# Altium PCB Buck_Converter_7.5V.PcbDoc
Units mil, origin at the board's own origin, x right, y up, seen from the top; angles counter-clockwise.
Board outline 1535.43 x 1259.84 mil, 2 copper layers (Top Layer, Bottom Layer), stack 61.855 mil thick; 12 components, 9 nets, 31 pads, 382 vias.
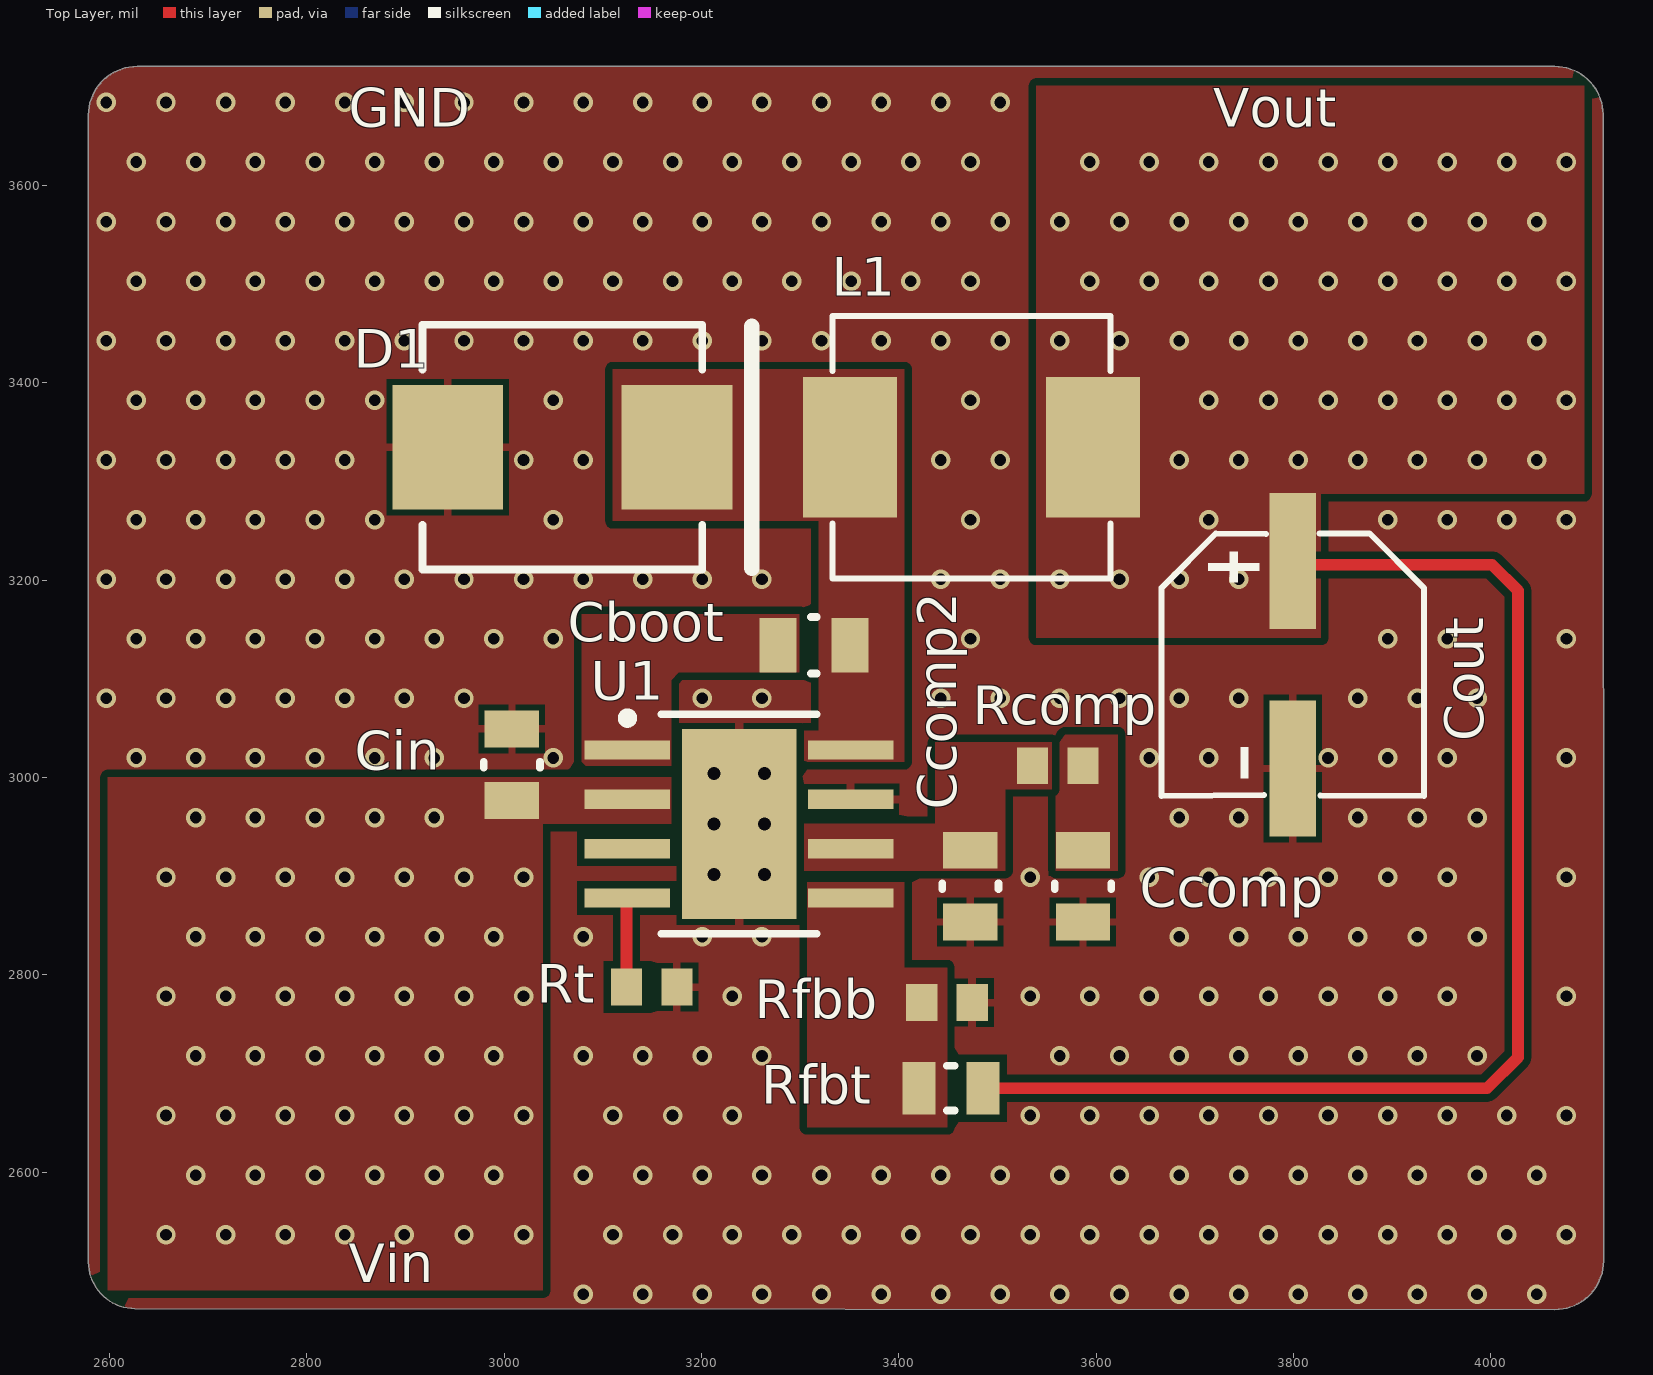
[diagram p0: Top Layer view]
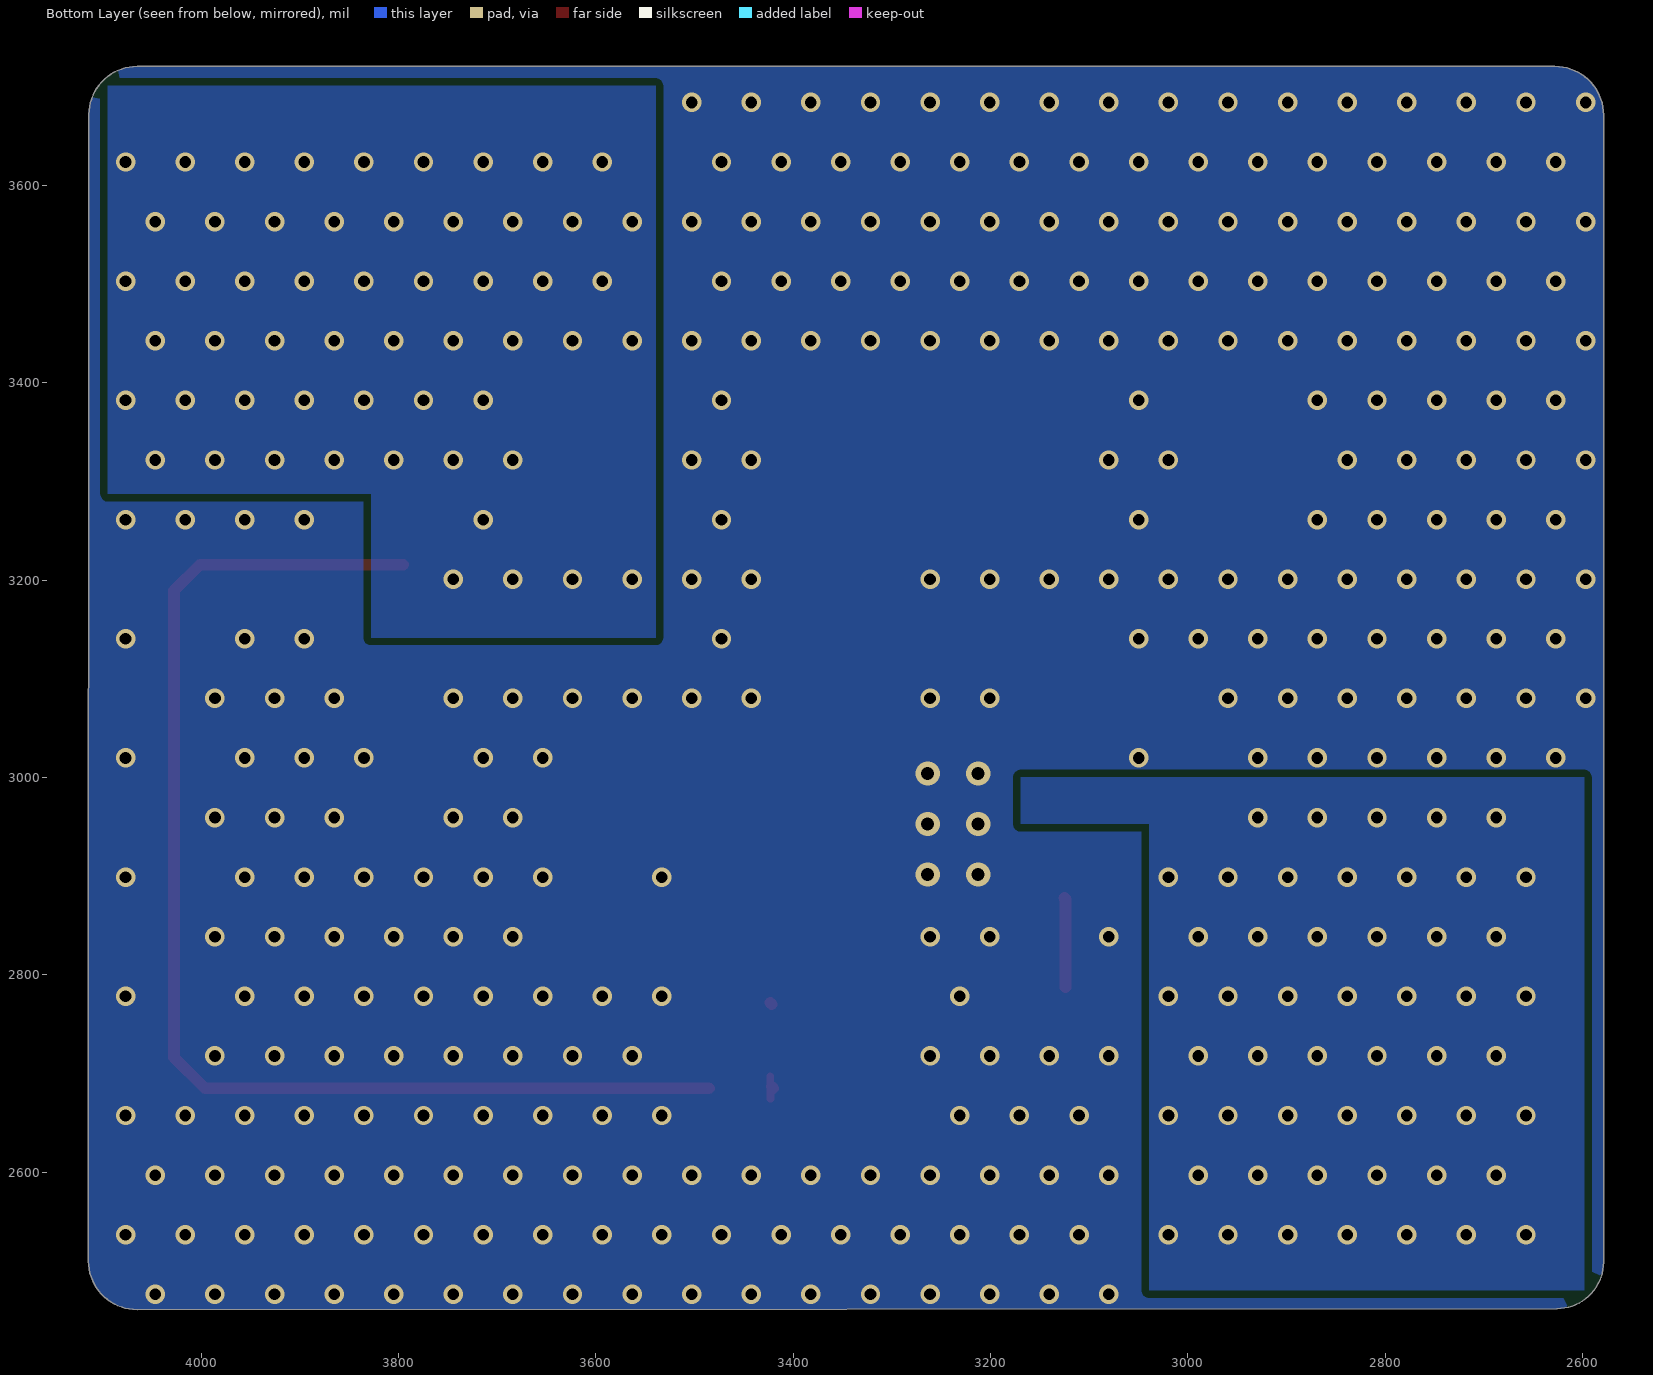
[diagram p1: Bottom Layer view, seen from below]
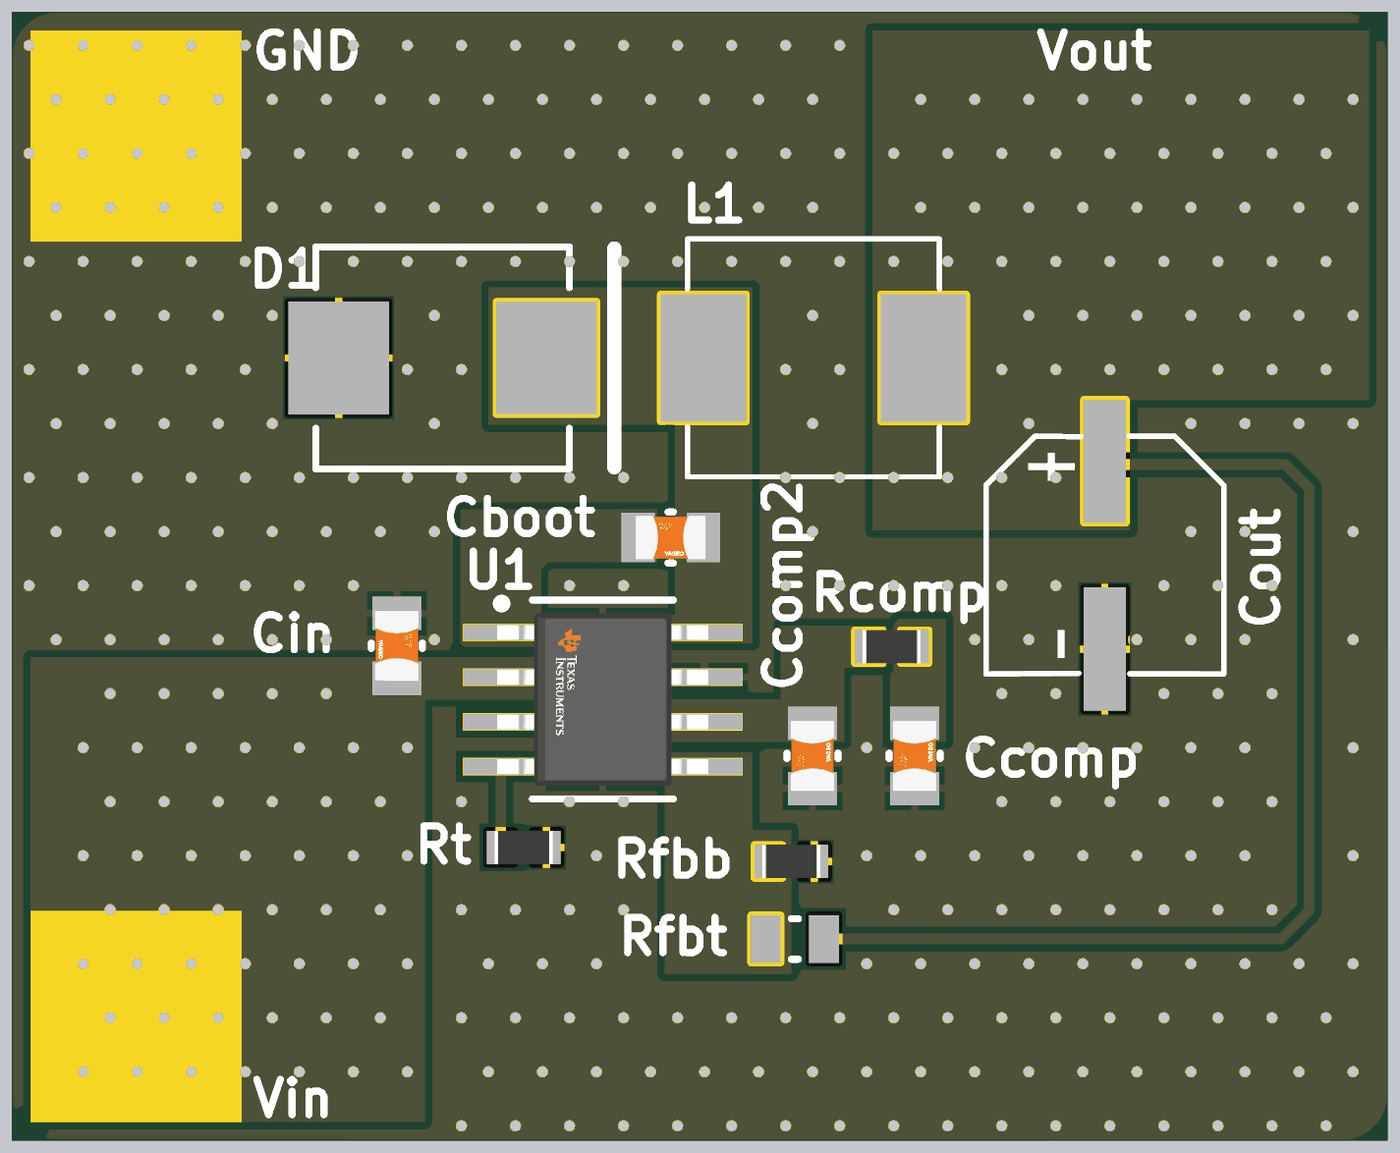
[diagram p2: 3D render of the assembled board from above, using the file's embedded part models]

## Layer stack, top to bottom
Top Solder: solder mask 0.4, Solder Resist, Dk 3.5
Top Layer: signal copper 1.4
Dielectric 1: dielectric 59.0551, FR-4, Dk 4.8
Bottom Layer: signal copper 1.4
Bottom Solder: solder mask 0.4, Solder Resist, Dk 3.5

## Board outline
2578.74,2508.81 ccw(c2625.92,2508.81) 2625.92,2461.63 4064.96,2460.63 ccw(c4064.96,2509.84) 4114.17,2509.84 4113.66,3671.26 4113.66,3671.77 ccw(c4064.96,3671.77) 4064.96,3720.47 2627.95,3720.47 ccw(c2627.95,3671.26) 2578.74,3671.26

## Design rules (kind name [scope] priority, off if disabled: settings)
Clearance [All] p1: gap=7.87 ignorepadtopadclearanceinfootprint=FALSE
DiffPairsRouting [All] p1: maxlimit=39.37 minlimit=5 mostfreqgap=7.87 toplayer_minwidth=5 toplayer_maxwidth=7.87 toplayer_prefwidth=7.87 bottomlayer_minwidth=5 bottomlayer_maxwidth=7.87 bottomlayer_prefwidth=7.87 maxuncoupledlength=500
Height [All] p1: minheight=0 maxheight=19685.04 prefheight=500
HoleSize [All] p1: absolutevalues=TRUE maxlimit=248.03 minlimit=11.81 maxpercent=80.000 minpercent=20.000
MinimumSolderMaskSliver [All] p1: minsoldermaskwidth=1.57
PolygonConnect CertainComponents [InComponent('C0','C00') vs InNet('GND')] p1: connectstyle=Direct reliefconductorwidth=7.87 reliefentries=4 polygonreliefangle="90 Angle" airgapwidth=7.87 // force certain component to be conencted with relieft connection
PolygonConnect GND [InNet('GND')] p2: thpad.connectstyle=Relief thpad.reliefconductorwidth=7.87 thpad.reliefentries=4 thpad.polygonreliefangle="90 Angle" thpad.airgapwidth=5.91 smdpad.connectstyle=Relief smdpad.reliefconductorwidth=7.87 smdpad.reliefentries=4 smdpad.polygonreliefangle="90 Angle" smdpad.airgapwidth=5.91 via.connectstyle=Direct via.reliefconductorwidth=10 via.reliefentries=4 via.polygonreliefangle="90 Angle" via.airgapwidth=10
PolygonConnect [All] p3: connectstyle=Direct reliefconductorwidth=11.81 reliefentries=4 polygonreliefangle="90 Angle" airgapwidth=7.87
RoutingVias [All] p1: holewidth=11.81 width=19.68 viastyle="Through Hole" minholewidth=11.81 minwidth=19.68 maxholewidth=248.03 maxwidth=275.59
SilkToSilkClearance [All] p1: silktosilkclearance=1.57
SilkToSolderMaskClearance [IsPad] p1: minsilkscreentomaskgap=1.57 clearancetoexposedcopper=TRUE
SolderMaskExpansion [All] p1: expansion=4 istentingtop=FALSE
SupplyNets "Schematic Supply Nets_2" [InNet('Vin')] p1: voltage=0.000
SupplyNets "Schematic Supply Nets_1" [InNet('Vout')] p2: voltage=0.000
SupplyNets "Schematic Supply Nets" [InNet('GND')] p3: voltage=0.000
Width [All] p1: maxlimit=78.74 minlimit=7.87 preferedwidth=7.87 minimp=50.000000 maximp=50.000000 favimp=50.000000
24 further rules are at their usual default settings.

## Components (designator, comment, footprint, x,y, rotation, side; value= is the part's Value field where it differs from the comment)
Cboot "100nF" FP-CC0805-0_85-MFG 3313.98,3133.86 r0 top value="100 nF"
Ccomp "560nF" FP-CC0805-0_85-MFG 3586.61,2889.76 r90 top value="100 nF"
Ccomp2 "16pF" FP-CC0805-0_85-MFG 3472.44,2889.76 r90 top value="100 nF"
Cin "4.7uF" FP-CC0805-0_85-MFG 3007.87,3012.8 r270 top value="100 nF"
Cout "100uF" CAP-SMD_BD6.3-L6.6-W6.6-LS7.6-RD 3799.21,3114.17 r270 top
D1 "B560C-13-F" DIOD-B5X0C-2_M 3059.06,3334.65 r180 top
L1 "8.2uH" IND-SMD_L7.0-W6.6_FXL0630 3473.54,3334.65 r180 top
Rcomp "28.7kR" RESC1609X50X30NL8T20 3561.02,3011.81 r180 top
Rfbb "11kR" RESC1609X50X30NL8T20 3448.82,2771.65 r180 top
Rfbt "92kR" RESC2013X50X30LL20T20 3452.76,2685.04 r0 top
Rt "105kR" RESC1609X50X30NL8T20 3149.61,2787.4 r180 top
U1 "TPS54560DDA" FP-DDA0008E-MFG 3238.19,2952.76 r0 top

## Footprints (in the part's own frame and the unit in brackets; to place one, negate y for a bottom-side part, rotate by r counter-clockwise, add the part's x,y. Pads: shape width x height; smd on the part's side, far side on the other; paste and mask are expansions set on the pad)
CAP-SMD_BD6.3-L6.6-W6.6-LS7.6-RD [mm]
  rect 3.5x1.2 smd: 1(-2.67,0) 2(2.67,0)
  silkscreen extent -3.38,-3.38 3.38,3.38
DIOD-B5X0C-2_M [mm] "Molded Diode, 2-Leads, Body 7.11x6.22mm, IPC Low Density"
  rect 2.85x3.2 smd: 1(-2.95,0) 2(2.95,0)
  silkscreen extent -4.87,-3.15 3.6,3.15, body extent -3.56,-3.11 3.55,3.11, height 2.63
FP-CC0805-0_85-MFG [mm]
  rect 0.95x1.4 smd paste+0 mask+0: 1(-0.925,0) 2(0.925,0)
  silkscreen extent -0.08,-0.72 0.08,0.72, body extent -1.6,-1.05 1.6,1.05, height 0.25
FP-DDA0008E-MFG [mm]
  rect 2.2x0.5 smd paste-1000 mask+0: 1(-2.875,1.905) 2(-2.875,0.635) 3(-2.875,-0.635) 4(-2.875,-1.905) 5(2.875,-1.905) 6(2.875,-0.635) 7(2.875,0.635) 8(2.875,1.905)
  rect 2.95x4.9 smd paste-1000 mask-1000: 9(0,0)
  silkscreen extent -3,-2.83 2,2.85, body extent -4.08,-2.68 4.08,2.68, height 0.25
IND-SMD_L7.0-W6.6_FXL0630 [mm]
  rect 2.424x3.62 smd: 1(3.128,0) 2(-3.128,0)
  silkscreen extent -3.58,-3.38 3.58,3.38
RESC1609X50X30NL8T20 [mm] "Chip Resistor, 2-Leads, Body 1.65x0.95mm, IPC Medium Density"
  rect 0.8x0.95 smd: 1(-0.65,0) 2(0.65,0)
  body extent -0.82,-0.48 0.82,0.48, height 0.5
RESC2013X50X30LL20T20 [mm] "Chip Resistor, 2-Leads, Body 2.00x1.25mm, IPC High Density"
  rect 0.85x1.35 smd: 1(-0.825,0) 2(0.825,0)
  silkscreen extent -0.1,-0.58 0.1,0.58, body extent -1.1,-0.72 1.1,0.72, height 0.5

## Part data
Cboot Ccomp Ccomp2 Cin: library part CMP-2100-03606-3, "CAP CER 0.1UF 50V X7R 0805", Capacitance="100 nF", Manufacturer=Yageo, Manufacturer Part Number=CC0805KRX7R9BB104, Package=CC0805-0.85, Temperature="-30°C to +85°C", Temperature Characteristic=X7R, Temperature Range High=+85°C, Temperature Range Low=-30°C, Tolerance=0.1, Voltage Rating="50 V", Automotive=No, Category=Cap, ComponentLink2Description=Datasheet, ComponentLink2URL=http://www.yageo.com/documents/recent/UPY-GPHC_Y5V_6.3V-to-50V_8.pdf, Device Class L1="Passive Components", Device Class L2=Capacitors, Device Class L3="Ceramic Capacitors", Digikey Description="CAP CER 0.1UF 50V X7R 0805", Footprint Url=http://www.yageo.com/exep/pages/download/literatures/UPY-C_GEN_24.pdf, Height=0.95mm, Ipc Land Pattern Name=CAPC200125X85, Lead Free=Yes, Material=Ceramic, Mouser Description="Multilayer Ceramic Capacitors MLCC - SMD/SMT 100nF 50V X7R 10%", Octopart=https://octopart.com/cc0805krx7r9bb104-yageo-192993, RoHS=TRUE
Cout: library part RVT1H101M0607, JLCPCB Part Class=扩展库, LCSC Part Name="100uF ±20% 50V", Manufacturer=ROQANG(容强), Operating Temperature=-40℃~+105℃, Ripple Current=229mA@120Hz, Tolerance=±20%, Voltage Rating=50V, Add into BOM=yes, Convert to PCB=yes, Datasheet=https://atta.szlcsc.com/upload/public/pdf/source/20170325/1490427950282.pdf, Device=RVT1H101M0607, Diameter=6.3mm, Height - Seated (Max)=7.7mm, Lifetime=2000hrs@105℃, Manufacturer Part=RVT1H101M0607, Supplier=LCSC, Supplier Footprint=SMD,D6.3xL7.7mm, Supplier Part=C3151829, Symbol=RVT1H101M0607
D1: library part CMP-2000-05098-2, "Schottky Barrier Rectifier, 5 A, 60 V, -55 to 125 degC, 2-Pin SMD, RoHS, Tape and Reel", If - Forward Current=5A, Ifsm - Forward Surge Current=100A, Ir - Reverse Current=500uA, Manufacturer=DiodesIncorporated, Maximum Operating Temperature=+125C, Minimum Operating Temperature=-55C, Operating Temperature Range=-55Cto+125C, Package / Case=SMC, Vf - Forward Voltage=0.7V, Vrrm - Repetitive Reverse Voltage=60V, Brand=DiodesIncorporated, Configuration=Single, Datasheet URL=https://datasheet.ciiva.com/27052/1538961-27052355.pdf, Datasheet Version="Rev. 7-2, 06/2007", Factory Pack Quantity=3000, Height=2.5mm, Length=7.11mm, Manufacturer URL=http://www.diodes.com/, Mounting Style=SMD/SMT, Packaging=Reel, Product=SchottkyDiodes, Product Category=SchottkyDiodes&Rectifiers, RoHS=True, Series=B560, Technology=Si, Termination Style=SMD/SMT, Type=SchottkyBarrierRectifier, Unit Weight=0.007408oz, Width=6.22mm
L1: library part FXL0630-8R2-M, DC Resistance (DCR)=60mΩ, JLCPCB Part Class=扩展库, LCSC Part Name="8.2uH ±20% 6A", Manufacturer=cjiang(长江微电), Rated Current=5A, Saturation Current (Isat)=6A, Tolerance=±20%, Add into BOM=yes, Convert to PCB=yes, Datasheet=https://atta.szlcsc.com/upload/public/pdf/source/20240426/3189EA8206330E2108542F9E34E540E7.pdf, Device=FXL0630-8R2-M, Manufacturer Part=FXL0630-8R2-M, Supplier=LCSC, Supplier Footprint=SMD,6.6x7mm, Supplier Part=C167222, Symbol=FXL0630-8R2-M, Type=一体成型电感
Rcomp Rfbb Rt: library part CMP-1666-00005-4, "Chip Resistor, 10 KOhm, +/- 1%, 100 mW, -55 to 155 degC, 0603 (1608 Metric), RoHS, Tape and Reel", Manufacturer="Vishay Semiconductor", Max Operating Temperature="155 degC", Min Operating Temperature="-55 degC", Package Quantity=5000, Voltage Rating="75 V", ComponentLink1Description="Manufacturer URL", ComponentLink1URL=http://www.vishay.com/, ComponentLink2Description=Datasheet, ComponentLink2URL=https://datasheet.ciiva.com/11809/0900766b80d98afc-11809037.pdf, DatasheetVersion=06/2012, Height="0.45 mm", Length="1.55 mm", Mounting Technology="Surface Mount", PackageDescription="2-Pin Surface Mount Device, Body 1.575 x 0.85 mm", PackageReference=0603, Packaging="Tape and Reel", REACH SVHC=Unknown, RoHSCompliant=true
Rfbt: library part CMP-2001-04896-1, Manufacturer="Vishay Dale", Part Number=CRCW08050000Z0EA
U1: library part CMP-04918-000033-1, "IC REG BCK SPLIT RAIL ADJ 8SOPWR", Manufacturer="Texas Instruments", Max Junction Temp=+150°C, Max Supply Voltage=60V, Min Supply Voltage=4.5V, Nominal Supply Current=146uA, Output Current=5A, Output Voltage=0.8-58.8V, Package=DDA0008E, Switching Frequency=100-2500kHz, Temperature="-40°C to +125°C", Temperature Range High=+125°C, Temperature Range Low=-40°C, Automotive=No, Category=IC, ComponentLink2Description=Datasheet, ComponentLink2URL=http://www.ti.com/lit/ds/symlink/tps54560.pdf, Device Class L1="Integrated Circuits (ICs)", Device Class L2="Power Management ICs", Device Class L3="Voltage Regulators - Switching", Digikey Description="IC REG BCK SPLIT RAIL ADJ 8SOPWR", Height=1.7mm, Ipc Land Pattern Name=SOIC127P600X170-8, Lead Free=Yes, Manufacturer Part Number=TPS54560DDA, Max Duty Cycle=100%, Mouser Description="Voltage Regulators - Switching Regulators 60V Input 5 A SD DC-DC Cnvtr", Number Of Outputs=1, Octopart=https://octopart.com/tps54560dda-texas+instruments-26977150, Output Type=AdjustableProgrammable, RoHS=TRUE, Standoff Height=0mm, Switching Topology=Buck

## Via types
v1: diameter 19.68, hole 11.81, Top Layer to Bottom Layer, tented both sides, 376 vias
v2: diameter 24.8, hole 12.99, Top Layer to Bottom Layer, 6 vias

## Nets (pads, with @x,y where several pads share a name; then routed paths per layer and width w, separated by ;. In a path a pad name is that pad's centre, name@x,y a point inside that pad or via, vN(x,y) a via of type N, cw(c..) or ccw(c..) an arc to the next point about the centre after c; other vN are vias at no path point)
GND: Ccomp2.1 Ccomp.1 Cin.1 Cout.2 D1.2 Rfbb.1 Rt.1 U1.7 U1.9
  other v1: 3080.08,2476.14 3140.47,2476.14 3200.87,2476.14 3261.26,2476.14 3321.65,2476.14 3382.05,2476.14 3442.44,2476.14 3502.83,2476.14 3563.23,2476.14 3623.62,2476.14 3684.02,2476.14 3744.41,2476.14 3804.8,2476.14 3865.2,2476.14 3925.59,2476.14 3985.98,2476.14 4046.38,2476.14 3110.28,2536.54 3170.67,2536.54 3231.06,2536.54 3291.46,2536.54 3351.85,2536.54 3412.24,2536.54 3472.64,2536.54 3533.03,2536.54 3593.43,2536.54 3653.82,2536.54 3714.21,2536.54 3774.61,2536.54 3835,2536.54 3895.39,2536.54 3955.79,2536.54 4016.18,2536.54 4076.57,2536.54 3080.08,2596.93 3140.47,2596.93 3200.87,2596.93 3261.26,2596.93 3321.65,2596.93 3382.05,2596.93 3442.44,2596.93 3502.83,2596.93 3563.23,2596.93 3623.62,2596.93 3684.02,2596.93 3744.41,2596.93 3804.8,2596.93 3865.2,2596.93 3925.59,2596.93 3985.98,2596.93 4046.38,2596.93 3110.28,2657.32 3170.67,2657.32 3231.06,2657.32 3533.03,2657.32 3593.43,2657.32 3653.82,2657.32 3714.21,2657.32 3774.61,2657.32 3835,2657.32 3895.39,2657.32 3955.79,2657.32 4016.18,2657.32 4076.57,2657.32 3080.08,2717.72 3140.47,2717.72 3200.87,2717.72 3261.26,2717.72 3563.23,2717.72 3623.62,2717.72 3684.02,2717.72 3744.41,2717.72 3804.8,2717.72 3865.2,2717.72 3925.59,2717.72 3985.98,2717.72 3231.06,2778.11 3533.03,2778.11 3593.43,2778.11 3653.82,2778.11 3714.21,2778.11 3774.61,2778.11 3835,2778.11 3895.39,2778.11 3955.79,2778.11 4076.57,2778.11 3080.08,2838.5 3200.87,2838.5 3261.26,2838.5 3684.02,2838.5 3744.41,2838.5 3804.8,2838.5 3865.2,2838.5 3925.59,2838.5 3985.98,2838.5 3533.03,2898.9 3653.82,2898.9 3714.21,2898.9 3774.61,2898.9 3835,2898.9 3895.39,2898.9 3955.79,2898.9 4076.57,2898.9 3684.02,2959.29 3744.41,2959.29 3865.2,2959.29 3925.59,2959.29 3985.98,2959.29 2627.13,3019.68 2687.52,3019.68 2747.91,3019.68 2808.31,3019.68 2868.7,3019.68 2929.09,3019.68 3049.88,3019.68 3653.82,3019.68 3714.21,3019.68 3835,3019.68 3895.39,3019.68 3955.79,3019.68 4076.57,3019.68 2596.93,3080.08 2657.32,3080.08 2717.72,3080.08 2778.11,3080.08 2838.5,3080.08 2898.9,3080.08 2959.29,3080.08 3200.87,3080.08 3261.26,3080.08 3442.44,3080.08 3502.83,3080.08 3563.23,3080.08 3623.62,3080.08 3684.02,3080.08 3744.41,3080.08 3865.2,3080.08 3925.59,3080.08 3985.98,3080.08 2627.13,3140.47 2687.52,3140.47 2747.91,3140.47 2808.31,3140.47 2868.7,3140.47 2929.09,3140.47 2989.49,3140.47 3049.88,3140.47 3472.64,3140.47 3895.39,3140.47 3955.79,3140.47 4076.57,3140.47 2596.93,3200.87 2657.32,3200.87 2717.72,3200.87 2778.11,3200.87 2838.5,3200.87 2898.9,3200.87 2959.29,3200.87 3019.68,3200.87 3080.08,3200.87 3140.47,3200.87 3200.87,3200.87 3261.26,3200.87 3442.44,3200.87 3502.83,3200.87 2627.13,3261.26 2687.52,3261.26 2747.91,3261.26 2808.31,3261.26 2868.7,3261.26 3049.88,3261.26 3472.64,3261.26 3895.39,3261.26 3955.79,3261.26 4016.18,3261.26 4076.57,3261.26 2596.93,3321.65 2657.32,3321.65 2717.72,3321.65 2778.11,3321.65 2838.5,3321.65 3019.68,3321.65 3080.08,3321.65 3442.44,3321.65 3502.83,3321.65 2627.13,3382.05 2687.52,3382.05 2747.91,3382.05 2808.31,3382.05 2868.7,3382.05 3049.88,3382.05 3472.64,3382.05 2596.93,3442.44 2657.32,3442.44 2717.72,3442.44 2778.11,3442.44 2838.5,3442.44 2898.9,3442.44 2959.29,3442.44 3019.68,3442.44 3080.08,3442.44 3140.47,3442.44 3200.87,3442.44 3261.26,3442.44 3321.65,3442.44 3382.05,3442.44 3442.44,3442.44 3502.83,3442.44 2627.13,3502.83 2687.52,3502.83 2747.91,3502.83 2808.31,3502.83 2868.7,3502.83 2929.09,3502.83 2989.49,3502.83 3049.88,3502.83 3110.28,3502.83 3170.67,3502.83 3231.06,3502.83 3291.46,3502.83 3351.85,3502.83 3412.24,3502.83 3472.64,3502.83 2596.93,3563.23 2657.32,3563.23 2717.72,3563.23 2778.11,3563.23 2838.5,3563.23 2898.9,3563.23 2959.29,3563.23 3019.68,3563.23 3080.08,3563.23 3140.47,3563.23 3200.87,3563.23 3261.26,3563.23 3321.65,3563.23 3382.05,3563.23 3442.44,3563.23 3502.83,3563.23 2627.13,3623.62 2687.52,3623.62 2747.91,3623.62 2808.31,3623.62 2868.7,3623.62 2929.09,3623.62 2989.49,3623.62 3049.88,3623.62 3110.28,3623.62 3170.67,3623.62 3231.06,3623.62 3291.46,3623.62 3351.85,3623.62 3412.24,3623.62 3472.64,3623.62 2596.93,3684.02 2657.32,3684.02 2717.72,3684.02 2778.11,3684.02 2838.5,3684.02 2898.9,3684.02 2959.29,3684.02 3019.68,3684.02 3080.08,3684.02 3140.47,3684.02 3200.87,3684.02 3261.26,3684.02 3321.65,3684.02 3382.05,3684.02 3442.44,3684.02 3502.83,3684.02
  other v2: 3212.6,2901.57 3263.78,2901.57 3212.6,2952.76 3263.78,2952.76 3212.6,3003.94 3263.78,3003.94
NetCboot_1: Cboot.1 U1.1
NetCboot_2: Cboot.2 D1.1 L1.1 U1.8
NetCcomp2_2: Ccomp2.2 Rcomp.2 U1.6
NetCcomp_2: Ccomp.2 Rcomp.1
NetRfbb_2: Rfbb.2 Rfbt.1 U1.5 | length 26.8
  Top Layer w7.87: Rfbt.1@3422.97,2674.21 3423.09,2685.01 Rfbt.1@3423.23,2696.85
  Top Layer w11.81: Rfbt.1 Rfbt.1@3421.75,2686.52 ; Rfbb.2@3421.75,2770.18 Rfbb.2
NetRt_2: Rt.2 U1.4 | length 90.8
  Top Layer w11.81: Rt.2 3124.02,2876.77 U1.4
Vin: Cin.2 U1.2
  other v1: 2657.32,2536.54 2717.72,2536.54 2778.11,2536.54 2838.5,2536.54 2898.9,2536.54 2959.29,2536.54 3019.68,2536.54 2687.52,2596.93 2747.91,2596.93 2808.31,2596.93 2868.7,2596.93 2929.09,2596.93 2989.49,2596.93 2657.32,2657.32 2717.72,2657.32 2778.11,2657.32 2838.5,2657.32 2898.9,2657.32 2959.29,2657.32 3019.68,2657.32 2687.52,2717.72 2747.91,2717.72 2808.31,2717.72 2868.7,2717.72 2929.09,2717.72 2989.49,2717.72 2657.32,2778.11 2717.72,2778.11 2778.11,2778.11 2838.5,2778.11 2898.9,2778.11 2959.29,2778.11 3019.68,2778.11 2687.52,2838.5 2747.91,2838.5 2808.31,2838.5 2868.7,2838.5 2929.09,2838.5 2989.49,2838.5 2657.32,2898.9 2717.72,2898.9 2778.11,2898.9 2838.5,2898.9 2898.9,2898.9 2959.29,2898.9 3019.68,2898.9 2687.52,2959.29 2747.91,2959.29 2808.31,2959.29 2868.7,2959.29 2929.09,2959.29
Vout: Cout.1 L1.2 Rfbt.2 | length 1271
  Top Layer w11.81: Rfbt.2 3996.06,2685.04 4027.56,2716.54 4027.56,3188.98 4001.18,3215.35 Cout.1@3795.28,3215.35
  other v1: 3563.23,3200.87 3623.62,3200.87 3684.02,3200.87 3744.41,3200.87 3714.21,3261.26 3684.02,3321.65 3744.41,3321.65 3804.8,3321.65 3865.2,3321.65 3925.59,3321.65 3985.98,3321.65 4046.38,3321.65 3714.21,3382.05 3774.61,3382.05 3835,3382.05 3895.39,3382.05 3955.79,3382.05 4016.18,3382.05 4076.57,3382.05 3563.23,3442.44 3623.62,3442.44 3684.02,3442.44 3744.41,3442.44 3804.8,3442.44 3865.2,3442.44 3925.59,3442.44 3985.98,3442.44 4046.38,3442.44 3593.43,3502.83 3653.82,3502.83 3714.21,3502.83 3774.61,3502.83 3835,3502.83 3895.39,3502.83 3955.79,3502.83 4016.18,3502.83 4076.57,3502.83 3563.23,3563.23 3623.62,3563.23 3684.02,3563.23 3744.41,3563.23 3804.8,3563.23 3865.2,3563.23 3925.59,3563.23 3985.98,3563.23 4046.38,3563.23 3593.43,3623.62 3653.82,3623.62 3714.21,3623.62 3774.61,3623.62 3835,3623.62 3895.39,3623.62 3955.79,3623.62 4016.18,3623.62 4076.57,3623.62
pads on no net: U1.3

## Polygon pours and split planes (outlines as drawn)
Vout on Top Layer "VOUT_L01_P022" (solid, remove dead copper, pour order 22): 4094.49,3700.79 4094.49,3287.4 3827.76,3287.4 3827.76,3141.73 3767.72,3141.73 3539.37,3141.73 3539.37,3255.91 3539.37,3700.79
GND on Top Layer "NONET_L-01_P-001" (solid, remove dead copper, pour order 34): 2578.74,2508.81 ccw(c2625.92,2508.81) 2625.92,2461.63 4064.96,2460.63 ccw(c4064.96,2509.84) 4114.17,2509.84 4113.66,3671.26 4113.66,3671.77 ccw(c4064.96,3671.77) 4064.96,3720.47 2627.95,3720.47 ccw(c2627.95,3671.26) 2578.74,3671.26
NetCboot_2 on Top Layer "NETCBOOT_2_L01_P016" (solid, remove dead copper, pour order 16): 3405.51,3413.39 3110.24,3413.39 3110.24,3259.84 3318.9,3259.84 3318.9,3047.24 3303.15,3047.24 3303.15,3011.81 3307.09,3015.75 3405.51,3015.75
Vin on Top Layer "VIN_L01_P014" (solid, remove dead copper, pour order 14): 2992.13,3000 3169.29,3000 3169.29,2952.76 3039.37,2952.76 3039.37,2480.32 2598.43,2480.32 2598.43,3000
NetCboot_1 on Top Layer "NONET_L-01_P-001" (solid, remove dead copper, pour order 32): 3299.21,3165.35 3078.74,3165.35 3078.74,3015.75 3082.68,3011.81 3169.29,3011.81 3169.29,3098.43 3177.17,3106.3 3299.21,3106.3
NetCcomp_2 on Top Layer "NETCCOMP_2_L01_P019" (solid, remove dead copper, pour order 19): 3559.06,3043.31 3622.05,3043.31 3622.05,2905.51 3559.06,2905.51
NetCcomp2_2 on Top Layer "NETCCOMP2_2_L01_P018" (solid, remove dead copper, pour order 18): 3555.12,3035.43 3555.12,2988.19 3507.87,2988.19 3507.87,2905.51 3303.15,2905.51 3303.15,2952.76 3437.01,2952.76 3437.01,3035.43
NetRfbb_2 on Top Layer "NETRFBB_2_L01_P015" (solid, remove dead copper, pour order 15): 3307.09,2893.7 3307.09,2645.67 3448.82,2645.67 3448.82,2807.09 3405.51,2807.09 3405.51,2893.7
GND on Bottom Layer "NONET_L-01_P-001" (solid, remove dead copper, pour order 33): 2578.74,2508.81 ccw(c2625.92,2508.81) 2625.92,2461.63 4064.96,2460.63 ccw(c4064.96,2509.84) 4114.17,2509.84 4113.66,3671.26 4113.66,3671.77 ccw(c4064.96,3671.77) 4064.96,3720.47 2627.95,3720.47 ccw(c2627.95,3671.26) 2578.74,3671.26
Vout on Bottom Layer "VOUT_L02_P027" (solid, remove dead copper, pour order 27): 4094.49,3700.79 4094.49,3287.4 3827.76,3287.4 3827.76,3141.73 3767.72,3141.73 3539.37,3141.73 3539.37,3255.91 3539.37,3700.79
Vin on Bottom Layer "VIN_L02_P024" (solid, remove dead copper, pour order 24): 2992.13,3000 3169.29,3000 3169.29,2952.76 3039.37,2952.76 3039.37,2480.32 2598.43,2480.32 2598.43,3000

## Other copper
Top Layer:
  region: 4094.49,3464.57 3858.27,3464.57 4094.49,3464.57

## Silkscreen, mask and mechanical layers (free items; w line width, h text height)
Top Overlay:
  text "GND" at 2842.52,3659.45 h39.37
  text "Vout" at 3718.5,3659.45 h39.37
  text "Vin" at 2842.52,2488.19 h39.37
Top Solder:
  region: 2598.43,3700.79 2598.43,3464.57 2834.65,3464.57 2834.65,3700.79
  region: 2598.43,2480.32 2834.65,2480.32 2834.65,2716.54 2598.43,2716.54
Bottom Solder:
  region: 2598.43,3700.79 2598.43,3464.57 2834.65,3464.57 2834.65,3700.79
  region: 2598.43,2480.32 2834.65,2480.32 2834.65,2716.54 2598.43,2716.54
Mechanical 1:
  lines w5: 4113.66,3671.26 4114.17,2509.84 cw(c4064.96,2509.84) 4064.96,2460.63 2625.92,2461.63 cw(c2625.92,2508.81) 2578.74,2508.81 2578.74,3671.26 cw(c2627.95,3671.26) 2627.95,3720.47 4064.96,3720.47 cw(c4064.96,3671.77) 4113.66,3671.77